# Altium PCB linkit-v4-1.1_6layers_smdonly.PcbDoc (part 4 of 5)
Units mm, origin at the board's own origin, x right, y up, seen from the top; angles counter-clockwise.
Board outline 70 x 35 mm, 6 copper layers (Top Layer, Int1 (GND), Int2 (Sign), Int3 (Sign), Int4 (PWR), Bottom Layer), stack 1.649 mm thick; 203 components, 154 nets, 694 pads, 939 vias.
Unrouted connection lines stored in the file: 1.
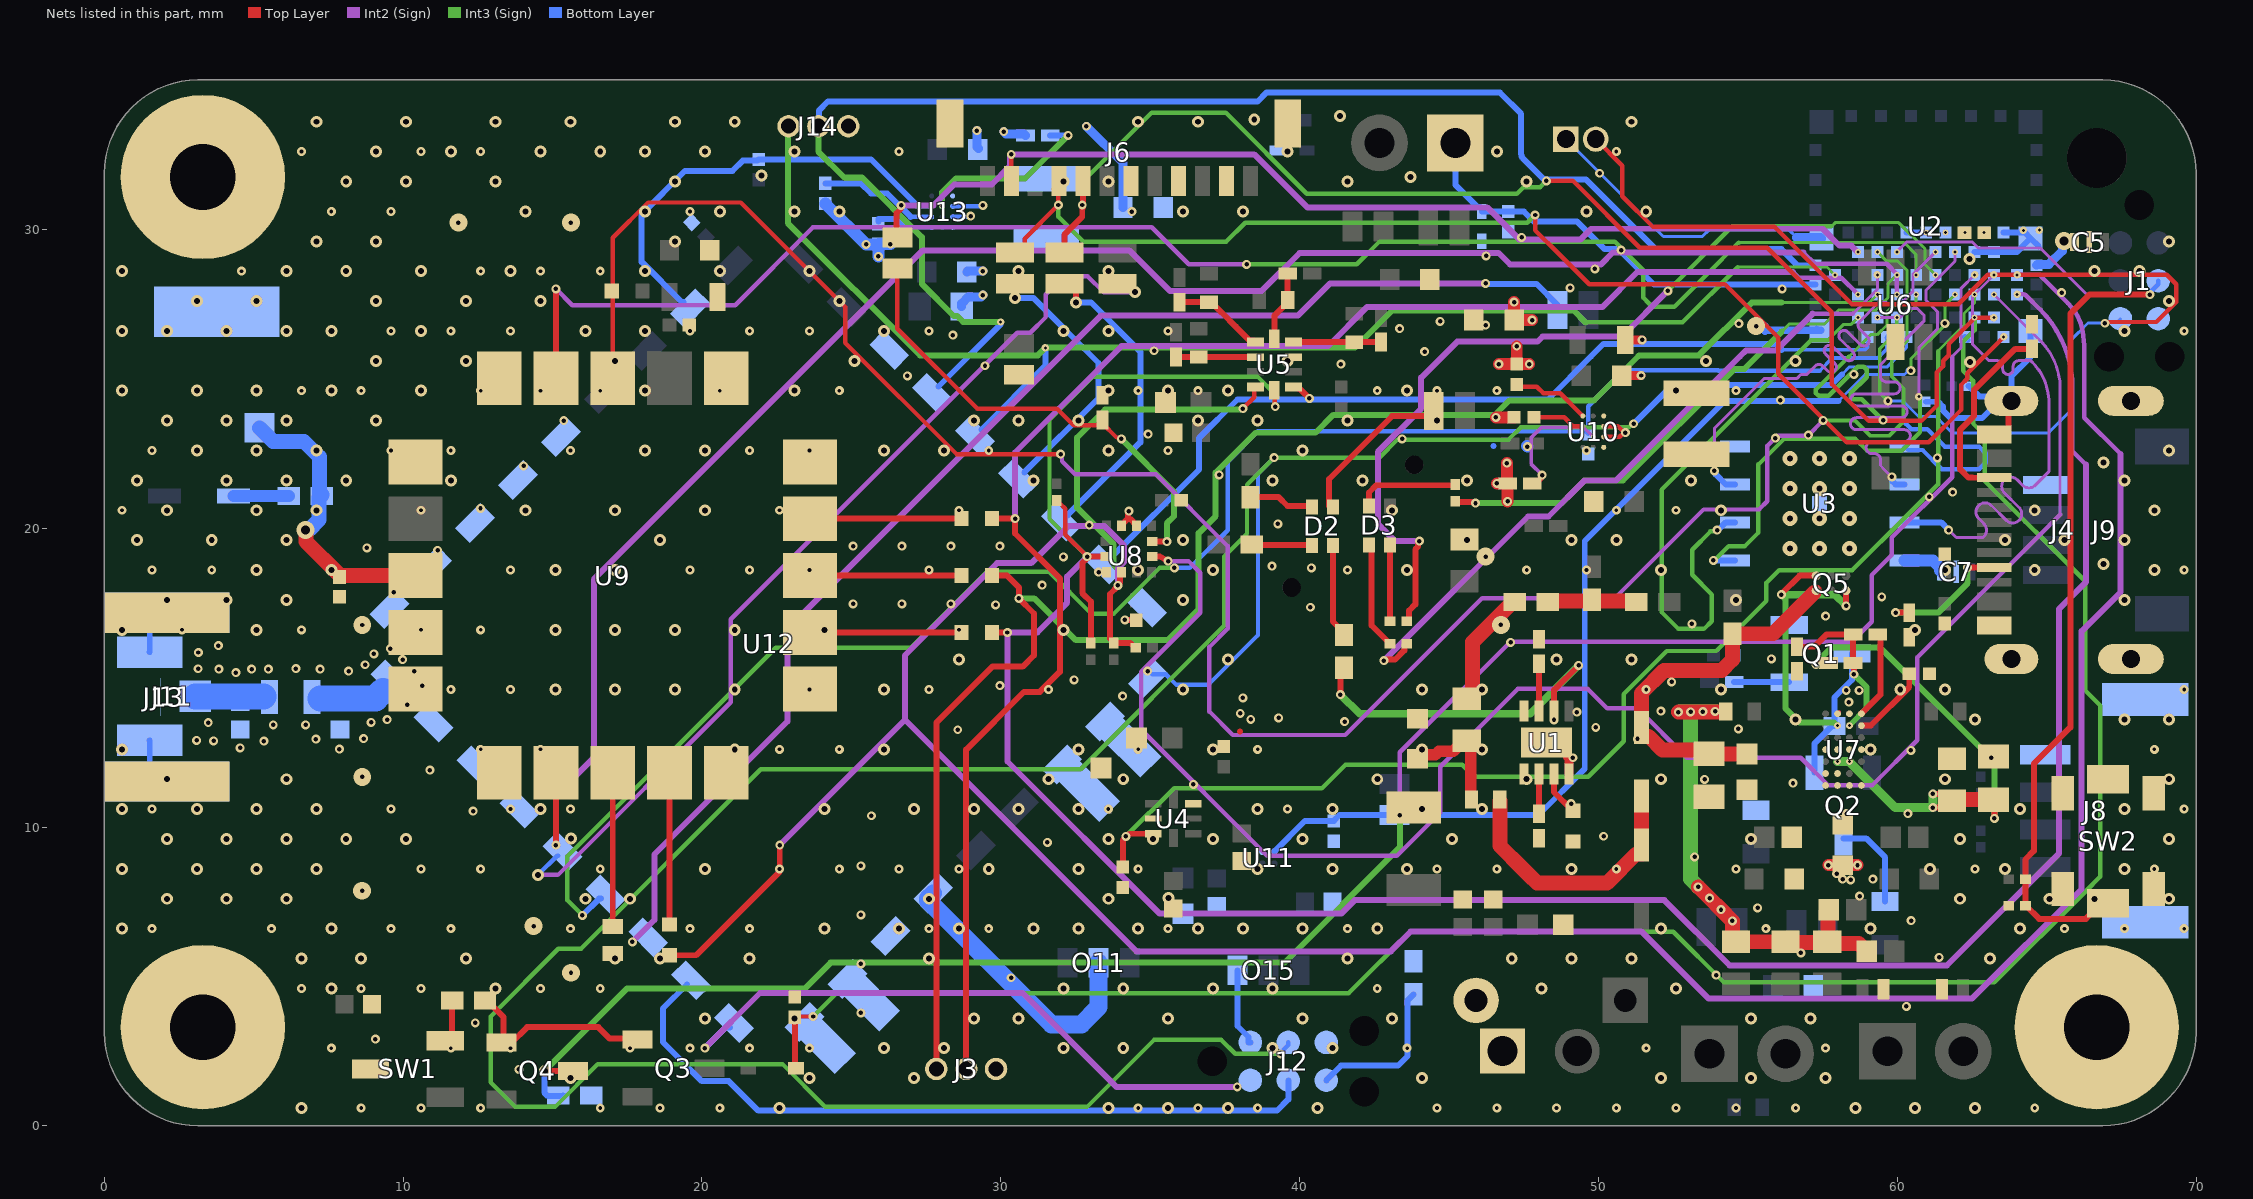
[diagram p7: the nets of this part, all layers, seen from the top]

## Via types
v1: diameter 0.3, hole 0.127, Int1 (GND) to Int3 (Sign), tented both sides, 148 vias
v2: diameter 0.4, hole 0.2, Int1 (GND) to Int2 (Sign), tented both sides, 103 vias
v3: diameter 0.3, hole 0.15, Top Layer to Int1 (GND), tented both sides, 99 vias
v4: diameter 0.4, hole 0.2, Int1 (GND) to Bottom Layer, tented both sides, 69 vias
v5: diameter 0.4, hole 0.2, Int1 (GND) to Int3 (Sign), tented both sides, 68 vias
v6: diameter 0.4, hole 0.2, Top Layer to Int1 (GND), tented both sides, 64 vias
v7: diameter 0.3, hole 0.15, Top Layer to Int4 (PWR), tented both sides, 63 vias
v8: diameter 0.3, hole 0.15, Top Layer to Int3 (Sign), tented both sides, 56 vias
v9: diameter 0.3, hole 0.15, Int1 (GND) to Bottom Layer, tented both sides, 46 vias
v10: diameter 0.4, hole 0.2, Top Layer to Bottom Layer, tented both sides, 34 vias
v11: diameter 0.3, hole 0.15, Int4 (PWR) to Bottom Layer, tented both sides, 18 vias
v12: diameter 0.3, hole 0.15, Top Layer to Int2 (Sign), tented both sides, 18 vias
v13: diameter 0.3, hole 0.15, Int3 (Sign) to Bottom Layer, tented both sides, 18 vias
v14: diameter 0.3, hole 0.15, Int2 (Sign) to Bottom Layer, tented both sides, 16 vias
v15: diameter 0.3, hole 0.15, Int1 (GND) to Int2 (Sign), tented both sides, 14 vias
v16: diameter 0.2, hole 0.1, Int3 (Sign) to Bottom Layer, tented both sides, 14 vias
v17: diameter 0.5, hole 0.2, Top Layer to Bottom Layer, tented both sides, 12 vias
v18: diameter 0.2, hole 0.1, Int2 (Sign) to Bottom Layer, tented both sides, 10 vias
v19: diameter 0.3, hole 0.15, Int2 (Sign) to Int3 (Sign), tented both sides, 9 vias
v20: diameter 0.6, hole 0.15, Int1 (GND) to Bottom Layer, tented both sides, 8 vias
v21: diameter 0.3, hole 0.15, Int1 (GND) to Int3 (Sign), tented both sides, 8 vias
v22: diameter 0.226, hole 0.1, Top Layer to Int3 (Sign), tented both sides, 6 vias
v23: diameter 0.3, hole 0.15, Top Layer to Bottom Layer, tented both sides, 5 vias
v24: diameter 0.25, hole 0.1, Int3 (Sign) to Bottom Layer, tented both sides, 5 vias
v25: diameter 0.25, hole 0.1, Int2 (Sign) to Bottom Layer, tented both sides, 5 vias
v26: diameter 0.25, hole 0.1, Top Layer to Bottom Layer, tented both sides, 5 vias
v27: diameter 0.2, hole 0.1, Top Layer to Bottom Layer, tented both sides, 3 vias
v28: diameter 0.6, hole 0.3, Top Layer to Bottom Layer, tented both sides, 3 vias
v29: diameter 0.6, hole 0.15, Int3 (Sign) to Bottom Layer, tented both sides, 2 vias
v30: diameter 0.25, hole 0.1, Int1 (GND) to Bottom Layer, tented both sides, 2 vias
v31: diameter 0.2, hole 0.1, Int1 (GND) to Bottom Layer, tented both sides, 2 vias
v32: diameter 0.4, hole 0.2, Int2 (Sign) to Bottom Layer, tented both sides, 1 vias
v33: diameter 0.4, hole 0.2, Top Layer to Int2 (Sign), tented both sides, 1 vias
v34: diameter 0.169, hole 0.1, Int3 (Sign) to Bottom Layer, tented both sides, 1 vias
v35: diameter 0.6, hole 0.15, Int4 (PWR) to Bottom Layer, tented both sides, 1 vias
v36: diameter 0.25, hole 0.1, Int2 (Sign) to Int3 (Sign), tented both sides, 1 vias
v37: diameter 0.169, hole 0.1, Top Layer to Int2 (Sign), tented both sides, 1 vias

## Nets (pads, with @x,y where several pads share a name; then routed paths per layer and width w, separated by ;. In a path a pad name is that pad's centre, name@x,y a point inside that pad or via, vN(x,y) a via of type N, cw(c..) or ccw(c..) an arc to the next point about the centre after c; other vN are vias at no path point) (continued)
GND: BT1.- C1.2 C3.1 C4.1 C5.3 C6.1 C7.3 C8.2 C9.1 C10.2 C11.1 C12.1 C13.2 C17.1 C18.1 C19.1 C20.2 C21.2 C22.2 C26.2 C27.2 C30.2 C31.2 C37.1 C38.1 C39.2 C40.1 C44.2 C45.1 C46.2 C47.1 C49.1 C51.2 C52.1 C53.1 C59.1 D7.2 D8.2 D9.2 D10.2 FB1.2 FB2.2 FB3.2 FB4.2 FB5.2 FB6.2 J1.5 J2.1 J3.1 J4.A1_B12 J4.B1_A12 J4.SHIELD J5.1 J6.2 J6.4 J6.6 J6.13 J6.14 J8.1 J8.MP1 J8.MP2 J9.1 J11.1 J11.2 J12.5 J13.2 J14.1 MH2.1 MH3.1 MH4.1 O13.1 Q1.2 R6.1 R7.1 R10.1 R11.1 R12.1 R19.1 R20.1 R21.1 R22.1 R26.1 R33.1 R34.1 R37.2 R39.2 R57.1 R58.1 R59.2 R60.2 R63.2 R65.1 R67.1 SW1.3 SW2.1 SW2.G1 SW2.G2 SW2.G3 SW2.G4 U2.1 U2.7 U2.14 U2.16 U2.18 U2.21 U2.23 U2.24 U2.25 U2.31 U3.4 U3.9 U4.3 U4.6 U5.1 U5.3 U6.2 U7.G2 U7.G3 U8.1 U8.8 U8.9 U9.1 U9.4 U9.5 U9.6 U9.10 U9.11 U9.15 U9.16 U9.20 U11.B1 U12.6 U12.13 U12.14 U12.15 U12.16 U12.17 U12.19 U12.20 U12.21 U12.29 | length 32.6
  Top Layer w0.1: U7.G3@58.001,13.792 U7.G3@58.068,13.859
  Top Layer w0.192: U8.1@33.536,18.529 U8.1@33.54,18.529
  Top Layer w0.2: v3(33.274,18.529) U8.1@33.536,18.529 ; U8.9@34.04,20.079 34.04,20.104 34.252,20.316 34.252,20.536 v3(34.29,20.574) ; v3(34.157,16.936) C38.1@34.523,16.936 ; 34.328,20.316 34.54,20.104 U8.8@34.54,20.079 ; 38.013,13.2 38.014,13.201 ; v3@38.014,13.805 v3(38.016,13.806) ; U5.1@39.797,24.728 39.935,24.728 39.999,24.664 40.009,24.664 v3(40.327,24.345) ; J4.B1_A12@63.518,23.141 63.718,23.341 63.718,24.161 J4.SHIELD@63.818,24.261
  Top Layer w0.4: v3(57.692,8.727) FB2.2@58.175,8.727 v3(58.669,8.727) ; J4.B1_A12@63.243,23.141 J4.B1_A12@63.518,23.141
  Bottom Layer w0.1: J2.1@48.911,33.02 52.17,29.761 53.477,29.761 53.689,29.972 56.387,29.972 56.626,29.733 ; U2.1@57.297,26.762 U2.1@57.46,26.599
  Bottom Layer w0.2: J11.1@1.524,12.902 1.525,12.901 1.525,12.101 J13.2@2.1,11.526 ; J11.2@1.524,15.852 J11.2@1.524,15.852 1.525,16.601 J13.2@2.1,17.176 ; 46.484,22.744 46.495,22.754 ; U2.14@60.31,29.899 v27(60.96,29.899) ; C3.1@60.96,24.231 61.367,24.231 61.526,24.072 61.526,23.944 61.79,23.68 62.837,23.68 63.418,24.261 J4.SHIELD@63.818,24.261 ; C4.1@62.384,24.752 62.404,24.752 62.742,24.414 63.665,24.414 J4.SHIELD@63.818,24.261 ; U2.21@62.585,29.249 U2.23@63.235,29.249 64.01,29.249 U2.25@64.46,29.699 ; U2.24@63.56,29.899 64.26,29.899 U2.25@64.46,29.699 ; U2.31@64.46,26.599 64.46,25.725 63.818,25.083 J4.SHIELD@63.818,24.261 ; U2.25@64.73,29.429 U2.25@64.46,29.699
  Bottom Layer w0.254: 55.575,26.599 55.412,26.762 v20(55.276,26.762) v20@55.575,26.762 ; 55.575,26.628 U2.1@57.431,26.628
  Bottom Layer w0.3: 56.626,29.733 57.425,29.733 U2.7@57.46,29.699
  Bottom Layer w0.4: v13@47.604,22.754 v13(47.625,22.733)
  other v1: 8.6,0.6 10.6,0.6 12.6,0.6 16.6,0.6 18.6,0.6 20.6,0.6 34.6,0.6 36.6,0.6 38.6,0.6 44.6,0.6 46.6,0.6 48.6,0.6 50.6,0.6 52.6,0.6 54.6,0.6 56.6,0.6 64.6,0.6 7.6,2.6 11.6,2.6 13.6,2.6 17.6,2.6 19.6,2.6 21.6,2.6 23.6,2.6 43.6,2.6 51.6,2.6 57.6,2.6 6.6,4.6 8.6,4.6 10.6,4.6 14.6,4.6 16.6,4.6 42.6,4.6 1.6,6.6 5.6,6.6 9.6,6.6 11.6,6.6 15.6,6.6 19.6,6.6 21.6,6.6 27.6,6.6 29.6,6.6 35.6,6.6 41.6,6.6 55.6,6.6 65.6,6.6 67.6,6.6 69.6,6.6 10.6,8.6 12.6,8.6 16.6,8.6 22.6,8.6 24.6,8.6 26.6,8.6 28.6,8.6 34.6,8.6 44.6,8.6 46.6,8.6 50.6,8.6 54.6,8.6 62.6,8.6 68.6,8.6 1.6,10.6 9.6,10.6 13.6,10.6 15.6,10.6 33.6,10.6 39.6,10.6 69.6,10.6 12.6,12.6 14.6,12.6 22.6,12.6 24.6,12.6 34.6,12.6 38.6,12.6 68.6,12.6 11.6,14.6 13.6,14.6 23.6,14.6 27.6,14.6 31.6,14.6 51.6,14.6 69.6,14.6 2.6,16.6 6.6,16.6 10.6,16.6 12.6,16.6 28.6,16.6 1.6,18.6 3.6,18.6 13.6,18.6 19.6,18.6 21.6,18.6 23.6,18.6 27.6,18.6 41.6,18.6 47.6,18.6 49.6,18.6 69.6,18.6 0.6,20.6 10.6,20.6 22.6,20.6 28.6,20.6 50.6,20.6 52.6,20.6 1.6,22.6 9.6,22.6 11.6,22.6 15.6,22.6 21.6,22.6 23.6,22.6 29.6,22.6 35.6,22.6 49.6,22.6 6.6,24.6 8.6,24.6 12.6,24.6 14.6,24.6 16.6,24.6 20.6,24.6 24.6,24.6 34.6,24.6 36.6,24.6 42.6,24.6 44.6,24.6 46.6,24.6 54.6,24.6 9.6,26.6 11.6,26.6 13.6,26.6 19.6,26.6 21.6,26.6 23.6,26.6 27.6,26.6 35.6,26.6 69.6,26.6 4.6,28.6 12.6,28.6 14.6,28.6 16.6,28.6 7.6,30.6 9.6,30.6 19.6,30.6 6.6,32.6 10.6,32.6 12.6,32.6 26.6,32.6 50.6,32.6
  other v2: 15.6,1.6 23.6,1.6 57.6,1.6 28.1,2.6 41.1,2.6 13.1,4.6 48.1,4.6 6.6,5.6 8.6,5.6 18.6,5.6 21.6,5.6 27.6,5.6 24.1,6.6 52.1,6.6 59.1,6.6 64.1,6.6 17.6,7.6 27.6,7.6 33.6,7.6 66.6,7.6 35.607,7.627 20.1,8.6 49.1,8.6 61.1,8.6 33.6,9.6 15.628,9.624 3.1,10.6 5.1,10.6 27.1,10.6 29.1,10.6 41.1,10.6 44.1,10.6 46.1,10.6 64.1,10.6 31.6,11.6 42.6,11.6 47.6,11.6 61.6,11.6 21.1,12.6 37.1,12.6 44.1,12.6 46.1,12.6 59.1,12.6 56.6,13.6 62.6,13.6 36.1,14.6 44.1,14.6 46.1,14.6 54.1,14.6 60.1,14.6 28.6,15.6 37.6,15.6 48.6,15.6 5.1,16.6 24.1,16.6 32.1,16.6 54.6,17.6 5.1,18.6 37.1,18.6 52.1,18.6 66.9,18.8 45.6,19.6 50.6,19.6 63.6,19.6 65.6,19.6 7.1,20.6 43.1,20.6 11.6,21.6 45.6,21.6 66.9,22.2 28.1,22.6 40.1,22.6 69.1,22.6 30.6,23.6 32.6,23.6 36.6,23.6 38.6,23.6 41.6,23.6 44.6,23.6 18.1,24.6 62.427,25.554 39.6,25.6 53.6,25.6 56.6,25.6 16.1,26.6 18.1,26.6 26.1,26.6 32.1,26.6 14.6,27.6 24.6,27.6 18.1,28.6 68.1,28.6 62.412,29.004 18.1,30.6 36.1,30.6 38.1,30.6 33.6,31.6 41.6,31.6 47.6,31.6 23.1,32.6 15.6,33.6 34.6,33.6 36.6,33.6
  other v3: 13.874,1.89 12.417,3.445 25.322,3.785 60.305,3.996 30.345,4.958 25.322,5.422 61.4,5.635 60.462,6.868 25.322,7.06 55.328,7.297 58.175,8.255 25.322,8.698 31.565,9.487 50.177,9.693 25.676,10.378 36.449,11.43 60.453,12.566 28.563,13.256 41.508,13.526 52.087,13.879 34.078,14.38 29.972,14.732 32.46,14.925 34.914,15.219 55.789,15.628 47.06,16.181 53.13,16.801 57.602,17.057 40.36,17.355 29.828,17.437 25.058,17.465 26.696,17.465 28.334,17.465 59.481,17.705 31.387,18.094 40.393,18.676 39.078,18.733 32.099,19.041 8.79,19.338 25.058,19.399 26.696,19.399 28.334,19.399 29.972,19.399 32.962,20.103 39.273,20.142 61.071,21.045 61.849,21.209 37.31,21.786 61.341,22.352 43.434,22.987 55.924,23.01 57.023,23.114 34.935,23.15 56.088,24.282 58.547,25.146 29.474,25.436 41.384,25.487 35.131,25.938 54.697,26.846 61.596,26.857 65.5,27.886 56.147,28.01 49.053,28.041 49.878,28.678 46.245,29.111 50.76,29.304 47.43,29.732 34.386,30.592 50.038,31.877
  other v4: 6.6,0.6 40.6,0.6 58.6,0.6 60.6,0.6 62.6,0.6 27.1,1.6 44.1,1.6 52.1,1.6 29.1,3.6 43.1,3.6 55.1,3.6 7.6,4.6 52.6,4.6 12.1,5.6 17.1,5.6 47.1,5.6 49.1,5.6 51.1,5.6 63.1,5.6 0.6,6.6 32.6,6.6 34.6,6.6 62.1,7.6 0.6,8.6 43.6,8.6 67.6,8.6 2.1,9.6 4.1,9.6 35.1,9.6 37.1,9.6 45.1,9.6 62.1,9.6 69.1,9.6 38.6,10.6 67.6,10.6 34.1,11.6 52.1,11.6 69.1,11.6 51.1,15.6 60.6,16.6 7.6,18.6 43.6,18.6 68.6,18.6 1.1,19.6 6.1,19.6 36.1,19.6 68.6,20.6 1.1,21.6 8.1,21.6 39.1,21.6 42.1,21.6 53.1,21.6 33.6,22.6 9.1,23.6 0.6,24.6 35.6,24.6 12.1,25.6 17.1,25.6 30.6,28.6 33.6,28.6 49.6,30.6 51.6,30.6 46.6,32.6 7.1,33.6 10.1,33.6 13.1,33.6 19.1,33.6 21.1,33.6 51.1,33.6
  other v5: 22.6,0.6 33.6,0.6 35.6,0.6 37.6,0.6 55.1,1.6 20.1,3.6 23.1,3.6 40.1,3.6 57.1,3.6 26.6,6.6 28.6,6.6 36.6,6.6 42.6,6.6 16.1,7.6 65.1,7.6 69.1,7.6 29.6,8.6 32.6,8.6 38.6,8.6 63.6,8.6 40.1,9.6 55.1,9.6 0.6,10.6 14.6,10.6 30.6,10.6 32.6,10.6 2.1,11.6 0.6,12.6 32.6,12.6 69.1,13.6 61.6,14.6 0.6,16.6 2.1,17.6 4.1,17.6 36.1,17.6 34.6,18.6 61.6,18.6 64.6,18.6 49.1,19.6 64.6,20.6 4.1,21.6 6.1,21.6 31.1,21.6 4.1,23.6 6.1,23.6 29.1,23.6 33.6,24.6 37.6,24.6 43.6,24.6 52.6,24.6 25.1,25.6 0.6,26.6 33.6,26.6 67.6,26.6 3.1,27.6 5.1,27.6 69.1,27.6 0.6,28.6 20.6,28.6 23.6,28.6 66.6,28.6 19.1,29.6 69.1,29.6 20.6,30.6 24.6,30.6 19.1,31.6 32.1,31.6 39.6,32.6
  other v6: 26.1,2.6 32.1,2.6 34.1,2.6 39.1,2.6 30.6,3.6 35.6,3.6 32.1,4.6 34.1,4.6 37.1,4.6 39.1,4.6 41.6,5.6 31.1,6.6 38.1,6.6 40.1,6.6 3.1,8.6 5.1,8.6 7.1,8.6 41.1,8.6 7.1,10.6 24.1,10.6 26.1,12.6 67.6,13.6 15.1,14.6 17.1,14.6 19.1,14.6 21.1,14.6 26.1,14.6 15.1,16.6 17.1,16.6 19.1,16.6 21.1,16.6 67.6,17.6 15.1,18.6 17.1,18.6 3.6,19.6 18.6,19.6 67.6,19.6 2.1,20.6 5.1,20.6 14.1,20.6 17.1,20.6 20.1,20.6 54.1,20.6 67.6,21.6 3.1,22.6 5.1,22.6 7.1,22.6 18.1,22.6 20.1,22.6 26.1,22.6 3.1,24.6 5.1,24.6 23.1,24.6 2.1,26.6 4.1,26.6 6.1,26.6 6.1,28.6 8.1,28.6 14.1,30.6 23.1,30.6 22,31.8 9.1,32.6 18.1,32.6 20.1,32.6
  other v9: 7.868,12.606 4.551,12.647 3.659,12.88 5.347,12.872 3.097,12.898 7.087,12.939 8.681,12.959 5.657,13.419 6.743,13.419 3.483,13.495 8.93,13.502 9.471,13.591 10.145,14.092 10.637,14.734 4.409,15.165 8.183,15.221 10.373,15.214 3.144,15.296 3.837,15.288 4.937,15.288 5.492,15.283 6.414,15.302 7.223,15.283 8.729,15.43 9.986,15.601 9.028,15.794 3.15,15.84 9.579,15.969 3.823,16.071 9.695,17.857 11.161,19.256 12.593,20.665 14.033,22.089 15.378,23.6 26.875,25.098 28.4,26.458
  other v10: 7.6,6.6 2.1,7.6 4.1,7.6 6.1,7.6 6.1,9.6 8.1,9.6 10.1,9.6 6.1,11.6 6.1,17.6 2.1,23.6 7.6,24.6 10.6,24.6 9.1,25.6 7.6,26.6 10.6,26.6 9.1,27.6 12.1,27.6 10.6,28.6 13.6,28.6 7.1,29.6 9.1,29.6 8.1,31.6 10.1,31.6 13.1,31.6 43.708,31.747 11.6,32.6 14.6,32.6 16.6,32.6 38.484,33.675 41.348,33.797
  other v12: 58.382,14.18 58.293,14.571 58.723,14.571
  other v13: 56.775,5.791 58.743,7.689 58.436,8.232 57.972,8.437
  other v14: 46.228,26.797
  other v15: 53.941,5.043 59.182,8.255 53.22,9.001 58.305,10.45 60.356,10.45 49.086,10.785 56.511,11.473 53.552,11.599 63.152,12.316 51.308,12.954 52.451,14.859 44.184,25.906 43.35,26.68 44.704,26.924
  other v17: 56.404,19.328 57.404,19.328 58.404,19.328 56.404,20.328 57.404,20.328 58.404,20.328 56.404,21.328 57.404,21.328 58.404,21.328 56.404,22.328 57.404,22.328 58.404,22.328
  other v20: 15.621,5.124 14.369,6.687 8.632,7.868 8.635,11.681 8.635,16.761 11.856,30.227 15.618,30.227
  other v21: 49.149,12.319 54.687,13.282 49.911,13.335 48.514,13.589 38.367,13.602 39.3,13.656 49.276,13.843 38.1,14.322
  other v23: 9.073,2.901 12.347,10.53 10.897,11.906
  other v29: 46.736,16.764 46.228,19.05
  other v30: 64.22,29.965 64.754,29.972
  other v31: 61.61,29.899
GPIO: J6.11 O10.1 U2.9 | length 36.6
  Top Layer w0.146: v12(30.353,32.512) J6.11@30.354,31.623 J6.11@30.354,31.623
  Top Layer w0.2: O10.1@26.543,29.731 26.514,29.76 26.514,30.54 26.67,30.696 v12(26.67,30.804)
  Int2 (Sign) w0.2: v12(26.67,30.804) 27.75,30.804 28.446,31.5 29.7,31.5 30.308,32.108 30.308,32.467 v12(30.353,32.512) 38.481,32.512 40.259,30.734 46.28,30.734 47.348,29.666 48.706,29.666 49.403,29.666 49.756,30.02 57.501,30.02 58.065,29.456 58.465,29.456 v18(58.681,29.24)
GPS_INT: U2.61 U9.19 | length 53.8
  Top Layer w0.2: U9.19@15.118,25.015 v12(15.118,28.01)
  Int2 (Sign) w0.15: v12(15.118,28.01) 15.666,27.462 21.112,27.462 23.716,30.066 35.05,30.066 36.287,28.829 v19(38.227,28.829)
  Int3 (Sign) w0.1: 54.691,29.558 60.231,29.558 60.635,29.154 v16(60.635,28.474)
  Int3 (Sign) w0.15: v19(38.227,28.829) 41.91,28.829 42.672,29.591 48.706,29.591 50.546,29.591 51.506,28.631 51.506,27.708 51.688,27.525 51.803,27.411 52.543,27.411 53.633,28.501 54.691,29.558
GPS_NRST: R48.2 U2.53 U9.18 | length 71.3
  Top Layer w0.146: U9.18@17.018,25.015 17.018,27.94 17.018,29.718 18.2,30.9 21.3,30.9 24.8,27.4 24.8,26.2 28.521,22.479 v12(32.004,22.479)
  Int2 (Sign) w0.146: v12(32.004,22.479) 32.053,22.43 32.053,22.24 32.49,21.802 35.198,21.802 37.592,19.408 37.592,16.637 36.984,16.029 36.984,13.862 37.767,13.079 41.527,13.079 46.11,17.662 50.555,17.662 53.521,20.628 55.376,20.628 55.648,20.899 55.648,22.755 55.988,23.095 57.009,23.095 v19(57.519,23.605)
  Int3 (Sign) w0.1: 60.332,26.269 60.332,27.167 60.635,27.47 v16(60.635,27.824)
  Int3 (Sign) w0.12: v19(57.519,23.605) 57.946,23.605 58.585,23.605 59.103,23.087 59.724,23.087 60.208,23.571 60.208,24.684 59.817,25.075 59.817,25.754 60.332,26.269
GPS_PPS: U2.54 U9.7 | length 62.4
  Top Layer w0.2: v12(15.113,9.398) 15.113,11.81 U9.7@15.118,11.815
  Int2 (Sign) w0.15: 56.858,29.228 57.24,28.846 59.645,28.846 59.985,28.507 v18(59.985,27.824)
  Int2 (Sign) w0.2: v12(15.113,9.398) 15.113,11.049 16.383,12.319 16.383,18.288 27.395,29.3 34.3,29.3 35.66,27.94 38.735,27.94 40.005,29.21 46.661,29.21 47.042,28.829 48.706,28.829 50.09,28.829 50.489,29.228 56.858,29.228
GPS_PWR_EN: R21.2 U2.50 U4.7 | length 42.5
  Top Layer w0.2: R21.2@34.079,8.662 34.085,8.668 34.085,9.557 34.189,9.661 v8(34.189,9.688) 34.216,9.688 34.304,9.776 35.096,9.776 U4.7@35.099,9.779
  Int3 (Sign) w0.1: 61.364,25.927 62.235,26.798 62.235,27.184 62.585,27.534 v16(62.585,27.824)
  Int3 (Sign) w0.15: v8(34.189,9.688) 35.804,11.303 40.75,11.303 41.537,12.09 45.441,12.09 45.847,11.684 49.657,11.684 50.846,12.873 50.846,14.45 52.287,15.891 53.942,15.891 55.624,17.573 55.624,18.173 56.05,18.599 58.494,18.599 60.346,20.451 61.364,21.47 61.364,25.745 61.364,25.927
GPS_UART_RX: J3.2 R40.2 U2.56 | length 54.6
  Top Layer w0.2: J3.2@28.845,1.905 28.845,12.589 30.779,14.523 31.309,14.523 31.978,15.191 31.978,18.323 30.48,19.821 v12(30.48,20.32) R40.2@29.713,20.32
  Int2 (Sign) w0.15: 56.515,28.575 56.708,28.382 58.127,28.382 v18(58.685,27.824)
  Int2 (Sign) w0.2: v12(30.48,20.32) 30.48,22.533 34.042,26.094 40.953,26.094 42.265,27.406 48.706,27.406 50.139,27.406 51.308,28.575 56.515,28.575
GPS_UART_TX: J3.3 R42.2 U2.55 | length 55.8
  Top Layer w0.2: J3.3@27.845,1.905 27.845,13.494 29.718,15.367 30.734,15.367 31.115,15.748 31.115,17.145 v8(30.607,17.653) 30.607,18.022 30.214,18.415 R42.2@29.713,18.415
  Int3 (Sign) w0.1: 56.134,27.549 59.06,27.549 v16(59.335,27.824)
  Int3 (Sign) w0.2: v8(30.607,17.653) 31.117,17.653 32.516,16.254 35.591,16.254 36.621,17.284 36.621,19.834 37.193,20.405 37.193,21.863 38.524,23.194 40.535,23.194 41.133,23.792 46.54,23.792 47.021,24.273 49.852,24.273 51.323,25.745 51.36,25.781 53.363,25.781 55.131,27.549 56.134,27.549
I2C_SCL: R1.1 R43.2 R54.1 U2.29 U5.10 U8.12 | length 89.5
  Top Layer w0.15: R54.1@31.877,20.929 31.877,20.909 31.962,20.824 31.982,20.824 32.157,20.649 32.157,19.786 v8(32.893,19.05) ; U8.12@33.513,19.052 U8.12@33.515,19.054 ; U5.10@39.159,24.618 39.173,24.604 39.173,24.083 v8(39.187,24.069)
  Top Layer w0.2: R43.2@29.713,16.515 29.716,16.512 30.224,16.512 v12(30.226,16.51) ; v8(32.893,19.05) 32.893,18.996 32.734,18.836 32.734,17.828 33.02,17.542 R1.1@33.02,16.155 ; v8@32.895,19.052 U8.12@33.513,19.052
  Int2 (Sign) w0.15: v25(64.01,27.824) 64.21,27.824 cw(c64.21,27.674) 64.316,27.78 64.793,27.302 ; 64.794,27.302 cw(c62.201,24.727) 65.831,25.146 cw(c62.201,24.727) 65.855,24.728 65.855,24.727 65.855,22.583 66.313,22.125
  Int2 (Sign) w0.2: v8(32.893,19.05) 32.223,18.38 32.223,17.509 31.224,16.51 v12(30.226,16.51) 30.226,12.192 35.306,7.112 41.406,7.112 41.847,7.552 52.208,7.552 54.393,5.367 61.661,5.367 65.416,9.122 65.416,17.298 66.313,18.196 66.313,22.125
  Int3 (Sign) w0.15: v8(32.893,19.05) 31.633,20.31 31.633,23.632 33.075,25.074 38.592,25.074 39.172,24.494 39.172,24.085 v8(39.187,24.069)
I2C_SDA: R2.1 R44.1 R56.1 U2.27 U5.9 U8.2 | length 108.5
  Top Layer w0.15: v8(38.1,24.003) 38.481,24.384 38.481,24.653 38.521,24.693 U5.9@38.521,24.728
  Top Layer w0.2: R44.1@18.918,5.71 19.807,5.71 22.606,8.509 v12(22.606,9.398) ; R2.1@33.782,16.155 33.782,16.175 33.656,16.301 33.656,16.735 33.656,17.799 33.917,18.061 33.917,18.115 33.99,18.188 33.99,18.479 U8.2@34.04,18.529 ; R2.1@33.788,16.161 34.339,16.161 34.498,16.002 R56.1@34.518,16.002
  Int2 (Sign) w0.15: v25(64.01,28.474) 64.77,28.474 65.709,27.535 cw(c64.43,26.257) 66.238,26.257 cw(c63.719,25.933) 66.258,25.992 cw(c66.108,25.989) 66.258,25.989 66.259,25.78 66.259,25.146 66.259,23.7 67.474,22.486
  Int2 (Sign) w0.2: v12(22.606,9.398) 26.797,13.589 ; v8(33.917,18.088) 33.917,18.653 34.134,18.87 34.134,19.408 33.475,20.066 32.258,20.066 31.02,18.828 29.877,18.828 26.797,15.748 26.797,13.589 ; 67.474,22.486 67.474,17.859 66.167,16.553 66.167,12.625 66.167,7.926 62.497,4.256 53.69,4.256 51.446,6.5 43.711,6.5 43.053,5.842 34.544,5.842 26.797,13.589
  Int3 (Sign) w0.2: v8(33.917,18.088) 33.917,18.643 33.782,18.778 33.782,19.461 32.56,20.683 32.56,23.035 33.496,23.971 38.068,23.971 v8(38.1,24.003)
INT1_IMU: U2.49 U8.5 | length 58.5
  Top Layer w0.2: U8.5@35.065,19.054 35.321,19.054 v12(35.599,18.901)
  Int2 (Sign) w0.1: v18(63.235,27.824) 64.797,26.262 cw(c63.22,24.684) 65.403,25.146 cw(c63.22,24.684) 65.451,24.684 65.451,24.682 65.451,20.458
  Int2 (Sign) w0.15: v12(35.599,18.901) 36.284,18.901 36.678,18.507 36.678,17.174 34.7,15.196 34.7,13.255 38.923,9.032 43.251,9.032 44.704,10.484 44.704,12.023 47.301,14.62 49.639,14.62 50.289,13.97 51.308,13.97 52.959,12.319 56.768,12.319 57.683,11.404 59.17,11.404 60.668,12.902 60.668,15.676 65.451,20.458
INT2_IMU: O10.2 R63.1 U8.6 | length 16.1
  Top Layer w0.15: O10.2@26.543,28.689 26.543,26.67 29.21,24.003 31.877,24.003 32.443,23.437 33.276,23.437 33.401,23.562 R63.1@33.401,23.622 33.401,23.509 33.876,23.035 33.988,23.035 v8(34.036,22.987)
  Top Layer w0.2: U8.6@35.065,19.554 v8(35.56,19.554)
  Int3 (Sign) w0.2: v8(34.036,22.987) 35.8,21.223 35.8,20.4 35.56,20.16 v8(35.56,19.554)
KIM_PWR_ON: U2.36 | length 0.1
  Bottom Layer w0.2: U2.36@62.26,26.399 U2.36@62.357,26.302
LED_B: R24.1 U2.63 | length 23.2
  Top Layer w0.2: v12(42.82,15.569) 42.858,15.607 43.199,15.607 43.507,15.915 43.507,16.069 43.567,16.129 R24.1@43.587,16.129
  Int2 (Sign) w0.1: 58.516,27.178 59.335,27.997 v25(59.335,28.474)
  Int2 (Sign) w0.15: 57.17,27.178 58.516,27.178
  Int2 (Sign) w0.2: v12(42.82,15.569) 47.642,20.391 48.331,20.391 49.53,21.59 50.58,21.59 54.735,25.745 54.943,25.953 55.945,25.953 57.17,27.178
LED_G: R25.1 U2.60 | length 30.4
  Top Layer w0.2: R25.1@43.587,16.891 43.607,16.891 43.667,16.951 43.667,17.244 43.874,17.451 43.874,19.293 43.969,19.389 43.969,19.527 v12(44.008,19.565)
  Int2 (Sign) w0.2: v12(44.008,19.565) 43.203,19.565 42.622,20.146 42.622,22.556 44.069,24.003 44.069,25.036 45.276,26.243 47.96,26.243 48.133,26.416 48.706,26.416 50.8,26.416 v19(52.324,27.94)
  Int3 (Sign) w0.1: 57.799,30.099 57.925,30.225 60.049,30.225 60.926,29.348 60.926,28.833 v16(61.285,28.474)
  Int3 (Sign) w0.15: v19(52.324,27.94) 54.483,30.099 57.799,30.099
LED_R: R23.1 U2.62 | length 18.2
  Top Layer w0.2: R23.1@45.212,20.903 45.242,20.873 45.857,20.873 v8(45.887,20.842)
  Int3 (Sign) w0.1: 56.134,26.579 56.384,26.829 57.563,26.829 58.039,27.305 59.283,27.305 59.692,27.713 59.692,28.181 v16(59.985,28.474)
  Int3 (Sign) w0.2: v8(45.887,20.842) 48.782,20.842 49.539,21.599 50.822,21.599 54.557,25.334 54.889,25.334 56.134,26.579
"LX1_TPS63901 3V3&2V31": L2.1 U10.A1
"LX1_TPS63901 3V3&2V32": L4.1 U13.A1
"LX2_TPS63901 3V3&2V31": L2.2 U10.D1
"LX2_TPS63901 3V3&2V32": L4.2 U13.D1
NetBT1_+: BT1.+ C40.2 R41.1 U9.3 | length 9.7
  Top Layer w0.5: v28(6.731,19.939) 6.75,19.92 6.75,19.558 C40.2@7.874,18.434 ; C40.2@7.925,18.415 U9.3@10.418,18.415
  Bottom Layer w0.5: BT1.+@5.195,23.36 5.647,22.908 6.683,22.908 7.201,22.39 7.201,21.124 7.207,21.119 R41.1@7.286,21.119 ; v28(6.731,19.939) 6.75,19.958 6.867,19.958 7.191,20.282 7.191,21.024 7.241,21.074 R41.1@7.279,21.074
NetC2_2: C2.2 R53.1 U1.8 | length 4
  Top Layer w0.4: R53.1@47.127,17.526 R53.1@47.202,17.526
  Top Layer w0.5: C2.2@45.593,14.289 45.668,14.289 45.793,14.414 45.793,16.192 R53.1@47.127,17.526
NetC5_2: C5.2 U2.26 | length 1.4
  Bottom Layer w0.3: U2.26@64.66,28.799 64.685,28.824 65.071,28.824 65.529,29.282 65.529,29.546 v28(65.586,29.603)
NetC7_2: C7.2 U3.8 | length 1.4
  Bottom Layer w0.4: U3.8@60.244,18.923 61.192,18.923 61.426,18.689 61.426,18.592 C7.2@61.476,18.542
NetC14_1: C14.1 R27.2 U5.4 | length 2.9
  Top Layer w0.2: U5.4@39.797,26.228 C14.1@41.829,26.228 R27.2@42.718,26.228
NetC15_1: C15.1 R30.2 U5.5 | length 2.5
  Top Layer w0.2: U5.5@39.159,26.338 39.159,27.113 39.604,27.558 C15.1@39.604,27.633 39.604,28.422 39.539,28.422 R30.2@39.639,28.522
NetC16_1: C16.1 R32.2 U5.6 | length 3.1
  Top Layer w0.2: R32.2@35.987,27.563 C16.1@36.967,27.563 37.042,27.563 37.395,27.21 37.403,27.21 37.868,26.744 38.334,26.278 38.471,26.278 U5.6@38.521,26.228
NetC23_1: C23.1 C24.2 C25.1 C28.2 C29.1 C32.2 C33.2 C43.2 U7.B3 U7.B4 | length 16.6
  Top Layer w0.4: v8(53.905,13.872) 54.252,13.872 C25.1@54.262,13.862
  Top Layer w0.5: v8(52.676,13.845) 54.187,13.845 C25.1@54.213,13.871 ; v8(53.34,8.001) v8(53.721,7.62) v8(54.102,7.239) v8(54.483,6.858) 54.483,6.447 54.517,6.413 54.517,6.159 54.519,6.161 C43.2@54.61,6.161 C24.2@56.261,6.161 C24.2@56.356,6.161 ; C24.2@56.38,6.137 C28.2@57.301,6.137 ; C28.2@57.682,6.161 57.682,7.128 57.706,7.152 C32.2@57.706,7.239 ; C28.2@57.741,6.107 58.711,6.107 58.866,5.952 58.881,5.952 58.976,5.857 C33.2@58.976,5.842
  Int3 (Sign) w0.5: v8@52.772,13.872 v8@53.104,13.872 ; v8(53.34,8.001) 53.086,8.255 v8(53.086,13.854) v8@53.104,13.872 ; v8(53.905,13.872) v8@53.104,13.872
  other v8: 53.496,13.863
NetC30_1: C30.1 C31.1 R36.1 U7.C2 U7.C3 | length 18
  Top Layer w0.2: v8(57.276,15.431) 57.295,15.45 57.653,15.45 R36.1@57.697,15.494 ; v8(61.195,10.653) 61.597,10.653 C31.1@61.86,10.916 ; v8(61.195,11.112) 61.604,11.112 C31.1@61.83,10.886 ; v8(63.246,10.287) C30.1@63.246,10.897
  Top Layer w0.5: C31.1@61.86,10.916 C30.1@63.227,10.916 C30.1@63.246,10.897
  Int3 (Sign) w0.2: v8(57.276,15.431) 57.276,15.458 57.326,15.508 57.326,15.543 57.785,16.002 59.436,16.002 63.246,12.192 v8(63.246,10.287)
  Int3 (Sign) w0.3: v22(58.001,12.192) v22(58.401,12.192) 59.94,10.653 v8(61.195,10.653) v8(61.195,11.112)
NetC49_2: C49.2 J11.3 J13.1 L3.2 | length 2.3
  Bottom Layer w0.87: J11.3@3.062,14.364 L3.2@5.334,14.364
NetC57_1: C57.1 R51.2 U5.7 | length 2.8
  Top Layer w0.2: R51.2@35.864,25.728 C57.1@36.626,25.728 U5.7@38.521,25.728 U5.7@38.519,25.73 ; C57.1@36.626,25.827 C57.1@36.723,25.73
NetC58_1: C58.1 D5.1 D6.1 U1.1 | length 9.1
  Top Layer w0.5: C58.1@46.703,10.872 46.703,9.374 47.462,8.615 47.462,8.61 47.813,8.259 47.818,8.259 47.949,8.128 50.292,8.128 51.269,9.105 51.435,9.105 51.435,9.271 D6.1@51.435,11.035
NetD2_1: D2.1 O9.2 | length 5.5
  Top Layer w0.2: D2.1@41.117,20.716 41.094,20.739 40.99,20.739 40.99,21.647 43.092,23.749 44.32,23.749 O9.2@44.491,23.92
NetD2_2: D2.2 R13.1 | length 2.2
  Top Layer w0.2: R13.1@38.354,21.04 39.298,21.04 39.596,20.742 40.391,20.742 D2.2@40.417,20.716
NetD2_3: D2.3 R14.2 | length 2
  Top Layer w0.2: R14.2@38.396,19.457 38.411,19.442 40.391,19.442 D2.3@40.417,19.416
NetD2_4: D2.4 R15.1 | length 3.1
  Top Layer w0.2: D2.4@41.117,19.416 41.117,16.875 41.492,16.5 R15.1@41.492,16.425
NetD3_2: D3.2 R23.2 | length 3.5
  Top Layer w0.2: D3.2@42.322,20.742 42.322,21.196 42.563,21.437 45.186,21.437 R23.2@45.212,21.463
NetD3_3: D3.3 R24.2 | length 3.6
  Top Layer w0.2: D3.3@42.322,19.442 42.409,19.355 42.409,16.747 42.947,16.209 42.947,16.189 43.007,16.129 R24.2@43.027,16.129
NetD3_4: D3.4 R25.2 | length 2.5
  Top Layer w0.2: R25.2@43.027,16.891 D3.4@43.027,19.437
NetD4_1: D4.1 R41.2 | length 1.9
  Bottom Layer w0.4: D4.1@4.323,21.074 R41.2@6.179,21.074
NetJ4_A5: J4.A5 R34.2 | length 4.7
  Top Layer w0.2: v8(59.944,17.176) R34.2@60.401,17.176 ; v8(62.357,18.691) J4.A5@63.243,18.691
  Int3 (Sign) w0.2: v8(59.944,17.176) 61.372,17.176 62.357,18.161 v8(62.357,18.691)
NetJ4_B5: J4.B5 R33.2 | length 6.6
  Top Layer w0.192: 62.517,21.691 J4.B5@62.818,21.691
  Top Layer w0.2: 62.517,21.691 62.383,21.691 62.103,21.971 62.103,23.29 62.564,23.751 62.564,24.615 63.953,26.004 R33.2@64.516,26.004 ; J4.B5@62.818,21.691 J4.B5@63.243,21.691
NetJ12_1: J12.1 O15.1 | length 2.6
  Bottom Layer w0.2: O15.1@37.922,5.207 37.922,3.343 38.291,2.975 38.291,2.794 J12.1@38.354,2.794
NetJ12_6: J12.6 R65.2 | length 5.2
  Bottom Layer w0.2: J12.6@40.894,1.524 41.388,2.018 43.293,2.018 43.615,2.34 43.615,4.203 R65.2@43.815,4.403
NetO11_2: O11.2 U12.30 | length 9.5
  Bottom Layer w0.6: U12.30@27.742,7.784 27.566,7.607 27.566,7.536 27.813,7.289 27.813,7.287 31.7,3.4 32.7,3.4 33.274,3.974 O11.2@33.274,5.461
NetQ1_1: Q1.1 R3.1 | length 1.8
  Bottom Layer w0.2: R3.1@54.544,14.846 Q1.1@56.384,14.846
NetQ1_3: Q1.3 Q2.1 R4.2 | length 4.5
  Bottom Layer w0.2: Q2.1@57.236,11.821 57.236,12.799 57.825,13.388 R4.2@57.9,13.388 57.9,14.339 58.484,14.923 Q1.3@58.484,15.801
NetQ2_3: Q2.3 R5.1 | length 3.1
  Bottom Layer w0.2: Q2.3@58.196,9.621 58.959,9.621 59.593,8.987 R5.1@59.593,7.509
NetQ3_1: Q3.1 Q4.1 R49.1 | length 6.8
  Top Layer w0.2: R49.1@12.742,4.191 12.817,4.191 13.37,3.638 13.37,2.86 13.441,2.79 13.648,2.79 14.142,3.284 14.142,3.302 16.537,3.302 16.918,2.921 17.807,2.921 Q3.1@18,2.728
NetQ5_A2: Q5.A2 Q5.C1 U7.F3 | length 10.1
  Top Layer w0.2: v8(56.126,17.777) 56.126,17.804 56.733,18.411 Q5.C1@57.285,18.411 ; v8(58.285,17.399) Q5.A2@58.285,17.911
  Int3 (Sign) w0.2: v8(56.126,17.777) 56.126,17.75 56.256,17.619 56.256,13.975 56.733,13.498 57.888,13.498 57.994,13.392 v22(58.001,13.392)
  Int3 (Sign) w0.254: v8(56.126,17.777) 57.907,17.777 v8(58.285,17.399)
NetR10_2: R10.2 U1.3 | length 1.5
  Top Layer w0.2: U1.3@48.51,11.777 48.51,11.172 49.137,10.546 R10.2@49.149,10.546
NetR11_2: R11.2 U1.2 | length 1.3
  Top Layer w0.2: R11.2@48.01,10.445 U1.2@48.01,11.777
NetR12_2: R12.2 U1.7 | length 1.6
  Top Layer w0.2: R12.2@48.006,15.463 48.008,15.461 48.008,13.879 U1.7@48.01,13.877
NetR17_1: R17.1 U2.20
  other v26: 62.26,29.899
NetR17_2: R17.2 U2.22
  other v26: 62.91,29.899
NetR36_2: R36.2 R38.1 R39.1 U7.F2 | length 5.5
  Top Layer w0.2: R39.1@56.642,16.033 57.223,16.033 57.63,16.44 R38.1@58.525,16.44 R36.2@58.525,15.498 ; R36.2@58.521,15.494 58.547,15.468 v8(58.547,15.113)
  Int3 (Sign) w0.2: v22(58.401,13.392) 58.401,13.399 58.971,13.969 58.971,14.689 v8(58.547,15.113)
NetR37_1: R37.1 U7.F1 | length 2.6
  Top Layer w0.2: U7.F1@58.801,13.392 58.806,13.397 59.117,13.397 60.401,14.681 R37.1@60.401,15.132
NetR38_2: R38.2 U7.G1 | length 2.9
  Top Layer w0.2: U7.G1@58.801,13.792 59.436,14.427 59.436,16.353 R38.2@59.349,16.44
NetR40_1: R40.1 U9.14 | length 5.1
  Top Layer w0.2: U9.14@23.618,20.315 23.623,20.32 R40.1@28.688,20.32
NetR42_1: R42.1 U9.13 | length 5.1
  Top Layer w0.2: U9.13@23.618,18.415 R42.1@28.688,18.415
NetR43_1: R43.1 U9.12 | length 5.1
  Top Layer w0.2: U9.12@23.618,16.515 R43.1@28.688,16.515
NetR44_2: R44.2 U9.9 | length 5.1
  Top Layer w0.2: R44.2@18.918,6.736 U9.9@18.918,11.815
NetR45_1: R45.1 U10.B2 | length 4.2
  Top Layer w0.2: R45.1@47.787,21.498 47.899,21.498 48.099,21.697 48.099,21.76 v12(48.118,21.78)
  Int2 (Sign) w0.1: 49.512,23.373 v37(49.828,23.057)
  Int2 (Sign) w0.12: v12(48.118,21.78) 47.747,22.15 47.747,23.021 48.098,23.373 49.512,23.373
NetR46_1: R46.1 U10.C3 | length 1.7
  Top Layer w0.15: R46.1@47.85,23.709 48.857,23.709 49.162,23.404 U10.C3@49.471,23.404
NetR47_2: R47.2 U10.D3 | length 2.6
  Top Layer w0.15: R47.2@47.266,24.737 47.938,24.737 48.162,24.513 48.36,24.513 48.362,24.511 48.724,24.511 U10.D3@49.478,23.757
NetR49_2: R49.2 SW1.2 | length 1.4
  Top Layer w0.2: SW1.2@11.41,2.855 11.417,2.855 11.642,3.08 R49.2@11.642,4.191
NetR52_1: R52.1 R53.2 R55.1 | length 3
  Top Layer w0.4: R53.2@48.302,17.526 R53.2@48.344,17.569 ; R55.1@49.741,17.569 R55.1@49.784,17.611 R55.1@49.827,17.569 ; R52.1@51.224,17.569 R52.1@51.266,17.526
  Top Layer w0.5: R53.2@48.344,17.569 R55.1@49.741,17.569 ; R55.1@49.827,17.569 R52.1@51.224,17.569
NetR68_1: R68.1 U13.B2 | length 6.1
  Int3 (Sign) w0.2: v34(28.041,30.769) 28.041,31.241 28.5,31.7 30.811,31.7 v13(32.258,33.147)
  Bottom Layer w0.2: R68.1@31.654,33.147 v13(32.258,33.147)
NetR69_1: R69.1 U13.C3 | length 4
  Bottom Layer w0.15: 26.985,30.419 U13.C3@27.691,30.419
  Bottom Layer w0.2: R69.1@24.13,31.541 25.32,31.541 25.66,31.201 26.203,31.201 26.985,30.419
NetR70_2: R70.2 U13.D3 | length 2
  Bottom Layer w0.15: 26.828,30.069 U13.D3@27.691,30.069
  Bottom Layer w0.2: R70.2@25.908,30.257 25.908,30.353 26.543,30.353 26.828,30.069
NPG_LED: R15.2 U1.6 | length 11.7
  Top Layer w0.2: v8(41.365,14.434) 41.365,15.198 R15.2@41.492,15.325 ; U1.6@48.51,13.877 48.51,14.581 v8(49.336,15.407)
  Int3 (Sign) w0.254: v8(41.365,14.434) 42.013,13.785 47.715,13.785 v8(49.336,15.407)
nRESET: C6.2 J1.3 R16.1 SW2.2 U2.13 | length 36.4
  Top Layer w0.2: C6.2@64.288,7.366 R16.1@64.288,8.255 64.288,8.916 64.573,9.201 64.573,12.122 65.789,13.338 65.789,27.177 66.425,27.813 v23(68.453,27.813) ; C6.2@64.308,7.366 64.746,6.928 66.309,6.928 66.831,7.45 SW2.2@67.056,7.45
  Int2 (Sign) w0.1: v18(59.985,29.249) 60.309,29.573 62.518,29.573 62.713,29.378 64.786,29.378 66.351,27.813 v23(68.453,27.813)
  Bottom Layer w0.15: v23(68.453,27.813) 68.453,27.881 68.736,28.164 J1.3@68.736,28.276
nRESET-SAT: J12.3 U2.42 U12.35 | length 101.6
  Int3 (Sign) w0.146: v13(39.37,2.413) 37.846,2.413 37.382,2.878 35.131,2.878 32.888,0.635 24.13,0.635 22.697,2.068 16.52,2.068 15.086,0.635 13.753,0.635 12.933,1.455 12.933,3.662 15.197,5.926 15.959,5.926 21.971,11.938 32.675,11.938 37.483,16.745 37.483,19.054 38.242,19.813 38.242,21.455 v13(39.146,22.36) 42.675,22.36 43.279,22.964 46.994,22.964 47.403,23.373 51.018,23.373 51.141,23.495 v13(51.181,23.495)
  Bottom Layer w0.1: 58.149,25.146 58.402,25.399 59.669,25.399 60.31,26.04 U2.42@60.31,26.399
  Bottom Layer w0.146: U12.35@35.073,15.114 35.525,15.114 35.884,14.756 35.895,14.767 36.952,14.767 38.608,16.424 38.608,21.822 v13(39.146,22.36) ; v13(39.37,2.413) 39.37,2.455 39.624,2.709 J12.3@39.624,2.794
  Bottom Layer w0.2: v13(51.181,23.495) 52.483,24.797 57.8,24.797 58.149,25.146
NRF_DBG: J1.6 J2.2 U2.43 | length 40.5
  Top Layer w0.146: J2.2@49.911,33.02 50.8,32.131 50.8,31.11 51.828,30.082 55.897,30.082 58.485,27.494 62.038,27.494 63.025,28.481 69.019,28.481 69.335,28.166 69.335,27.567 68.667,26.9 66.988,26.9 v23(66.947,26.858)
  Int3 (Sign) w0.12: v13(59.69,24.257) 59.412,24.535 59.412,26.002 59.985,26.575 v16(59.985,27.049)
  Bottom Layer w0.1: v13(59.69,24.257) 60.191,24.257 60.711,23.737 61.285,23.737 61.837,23.185 65.051,23.185 65.786,23.92 65.786,26.275 66.38,26.87 66.935,26.87 v23(66.947,26.858) 67.004,26.916 67.375,26.916 J1.6@67.466,27.006
PGND1: C41.1 C42.1 C48.1 C50.1 C55.2 C61.2 FB3.1 FB4.1 R45.2 R46.2 R47.1 R68.2 R69.2 R70.1 U10.B1 U10.C1 U13.B1 U13.C1 | length 18.6
  Top Layer w0.15: U10.B1@50.178,23.057 50.716,23.057 v3@50.859,23.2 ; U10.C1@50.178,23.407 50.652,23.407 v3@50.859,23.2 ; v3(50.9,23.2) v3@50.859,23.2
  Top Layer w0.3: C42.1@50.775,25.1 50.95,25.11 v3(51.426,25.11) ; C55.2@50.988,26.305 v3(51.463,26.305)
  Top Layer w0.4: v3(46.57,23.709) R46.2@47.17,23.709 ; v3(46.602,21.498) R45.2@46.963,21.498 v3(46.963,20.898) ; v3(46.666,25.489) R47.1@47.266,25.489 R47.1@47.266,25.489 ; R45.2@46.937,21.577 v3(46.937,22.177) ; v3(47.179,27.565) FB4.1@47.179,26.965 v3(47.779,26.965) ; v3(47.267,26.088) R47.1@47.266,25.489 ; v3(47.686,25.488) R47.1@47.266,25.489
  Bottom Layer w0.15: U13.C1@28.391,30.419 28.395,30.422 28.975,30.422 v9(28.994,30.441) ; U13.B1@28.391,30.769 28.395,30.765 28.95,30.765 28.956,30.771 29.371,30.771 v9(29.4,30.8) ; C41.1@29.229,32.673 C41.1@29.259,32.703 ; R68.2@30.826,33.143 R68.2@30.83,33.147
  Bottom Layer w0.3: C61.2@28.695,27.419 28.695,27.514 28.92,27.739 29.339,27.739 v9(29.4,27.8) ; C50.1@28.869,28.575 28.894,28.6 v9(29.403,28.6) ; v9(29.2,33.3) 29.2,32.762 C41.1@29.259,32.703 ; v9(30.101,33.273) 30.177,33.197 30.772,33.197 R68.2@30.826,33.143 ; v9(32.87,33.45) 34.092,32.228 FB3.1@34.092,30.734
  Bottom Layer w0.4: R69.2@24.13,30.861 24.13,30.851 24.14,30.841 24.15,30.841 v9@25.491,29.5 ; v9(25.5,29.5) R70.1@25.903,29.5 ; v9(25.903,29.097) R70.1@25.903,29.5 ; v9(26.311,29.505) R70.1@25.908,29.505 R70.1@25.903,29.5
PGND3: FB2.1 U7.A1 U7.A2 U7.A3 U7.A4
PGND4: C2.1 C58.2 FB6.1 U1.4 U1.9 | length 5.5
  Top Layer w0.3: U1.9@48.26,12.827 48.61,12.827 48.96,12.477 48.96,12.351 49.01,12.301 U1.4@49.01,11.777
  Top Layer w0.385: FB6.1@43.942,12.279 44.075,12.412 44.543,12.412 44.663,12.532 45.141,12.532 45.498,12.889 C2.1@45.593,12.889 45.72,12.762 45.72,10.955 C58.2@45.753,10.922
POWER_CONTROL: D1.2 R58.2 U2.35 | length 69.6
  Top Layer w0.15: R58.2@23.114,3.638 23.136,3.661 v8(23.727,3.661)
  Top Layer w0.2: R58.2@23.114,3.628 23.114,1.968 D1.2@23.152,1.93 D1.2@23.207,1.93
  Int3 (Sign) w0.15: v8(23.727,3.661) 24.511,4.445 41.645,4.445 43.7,6.5 52.5,6.5 54.2,4.8 63.25,4.8 66.288,7.838 66.793,8.342 66.793,14.064 66.288,14.569 66.288,18.221 62.921,21.588 62.921,23.119 62.536,23.504 62.536,24.933 62.2,25.269 62.2,26.244 62.585,26.629 v16(62.585,27.049)
QSPI_CLK: U2.45 U3.6 | length 17.4
  Int2 (Sign) w0.1: v18(59.335,27.049) 60.098,27.049 60.394,27.344 60.674,27.344 60.887,27.131 60.887,26.921 59.71,25.745 59.436,25.471 59.436,25.146 59.436,25.096 ccw(c59.636,25.096) 59.636,24.896 59.898,24.896 cw(c59.898,24.696) 59.898,24.496 58.636,24.496 ccw(c58.636,24.296) 58.636,24.096 60.129,24.096 cw(c60.129,23.896) 60.129,23.696 58.636,23.696 ccw(c58.636,23.496) 58.636,23.296 60.236,23.296 cw(c60.236,23.096) 60.236,22.896 59.158,22.896 ccw(c59.158,22.696) 59.158,22.496 59.236,22.496 cw(c59.236,22.296) 59.436,22.296 59.436,22.098 59.568,21.966 v14(59.817,21.717)
  Bottom Layer w0.2: v14(59.817,21.717) 59.844,21.69 59.844,21.563 59.944,21.463 U3.6@60.244,21.463
QSPI_CS: U2.19 U3.1 | length 18
  Int2 (Sign) w0.1: v36(60.722,24.405) 60.722,26.046 61.346,26.67 61.346,27.247 60.954,27.639 60.954,27.953 61.935,28.933 v18(61.935,29.249)
  Int3 (Sign) w0.15: v14(53.848,18.923) 53.882,18.923 54.36,19.401 54.902,19.401 55.356,19.855 55.356,22.134 56.209,22.987 58.599,22.987 59.002,22.584 60.129,22.584 60.761,23.216 60.761,24.366 v36(60.722,24.405)
  Bottom Layer w0.2: v14(53.848,18.923) U3.1@54.564,18.923
QSPI_IO0: U2.11 U3.5 | length 18.9
  Int3 (Sign) w0.1: 58.384,25.745 59.115,26.476 59.327,26.476 59.653,26.802 59.653,27.239 59.879,27.465 60.101,27.465 60.32,27.684 60.32,28.638 60.021,28.937 59.647,28.937 v16(59.335,29.249)
  Int3 (Sign) w0.15: 58.384,25.745 57.28,24.641 57.28,24.517 57.368,24.429 57.703,24.429 58.674,25.4 58.875,25.4 58.976,25.299 58.976,25.054 58.449,24.527 58.449,24.403 58.537,24.315 58.812,24.315 v13@59.513,23.614
  Bottom Layer w0.15: v13(59.524,23.614) 60.171,23.614 60.467,23.317 61.007,23.317 61.591,22.733 62.738,22.733 62.963,22.508 62.963,22.196 62.738,21.971 61.491,21.971 60.846,22.616 60.361,22.616 U3.5@60.244,22.733
QSPI_IO1: U2.47 U3.2 | length 19.5
  Int3 (Sign) w0.1: 57.673,26.289 58.206,26.822 58.458,26.822 v16(58.685,27.049)
  Int3 (Sign) w0.15: v14(53.975,19.939) 53.927,19.891 53.749,19.891 53.137,19.279 53.137,18.438 53.794,17.781 53.794,16.89 53.531,16.627 52.679,16.627 52.113,17.194 52.113,21.287 56.57,25.745 57.114,26.289 57.673,26.289
  Bottom Layer w0.2: v14(53.975,19.939) 54.01,19.939 54.264,20.193 U3.2@54.564,20.193
QSPI_IO2: U2.17 U3.3 | length 16.7
  Int2 (Sign) w0.1: v14(53.884,21.917) 53.884,23.346 55.543,25.005 56.633,25.005 56.774,25.146 56.973,25.146 57.255,25.429 cw(c57.379,25.305) 57.503,25.429 57.662,25.27 ccw(c57.786,25.393) 57.91,25.27 ccw(c57.786,25.393) 57.91,25.517 57.604,25.823 cw(c57.727,25.947) 57.604,26.071 cw(c57.727,25.947) 57.851,26.071 58.269,25.653 ccw(c58.393,25.776) 58.517,25.653 ccw(c58.393,25.776) 58.517,25.9 58.099,26.318 cw(c58.222,26.442) 58.099,26.566 cw(c58.222,26.442) 58.346,26.566 58.764,26.148 ccw(c58.888,26.271) 59.012,26.148 ccw(c58.888,26.271) 59.012,26.395 58.74,26.666 cw(c58.864,26.79) 58.74,26.914 59.375,27.549 ; 59.306,27.48 59.306,27.49 59.365,27.549 59.375,27.549 ; v18(61.285,29.249) 60.521,28.485 60.521,27.923 60.09,27.492 59.701,27.492 59.644,27.549 59.375,27.549
  Bottom Layer w0.2: v14(53.884,21.917) 53.922,21.879 53.922,21.805 54.264,21.463 U3.3@54.564,21.463
QSPI_IO3: U2.57 U3.7 | length 18.5
  Int2 (Sign) w0.1: v14(61.722,19.939) 61.976,19.685 62.865,19.685 62.9,19.72 ccw(c62.685,19.935) 62.9,20.15 62.723,20.327 cw(c62.938,20.542) 62.723,20.757 cw(c62.938,20.542) 63.153,20.757 63.647,20.263 ccw(c63.862,20.478) 64.077,20.263 ccw(c63.862,20.478) 64.077,20.693 63.583,21.187 cw(c63.798,21.402) 63.583,21.617 cw(c63.798,21.402) 64.013,21.617 64.19,21.44 ccw(c64.405,21.655) 64.62,21.44 65.072,21.892 65.072,24.302 ccw(c63.173,24.211) 64.829,25.146 ccw(c63.173,24.211) 64.605,25.461 64.463,25.604 64.104,25.604 64.054,25.604 ccw(c64.054,25.429) 63.879,25.429 63.879,25.321 cw(c63.704,25.321) 63.704,25.146 cw(c63.704,25.321) 63.529,25.321 63.529,25.429 ccw(c63.354,25.429) 63.354,25.604 63.066,25.604 62.891,25.779 62.515,26.155 62.515,27.754 v25(63.235,28.474)
  Bottom Layer w0.2: U3.7@60.244,20.193 61.468,20.193 v14(61.722,19.939)
REED_MCU: Q4.3 R7.2 U2.58 | length 67.7
  Top Layer w0.2: v10(14.744,1.845) 15.536,1.845 Q4.3@15.541,1.84
  Int2 (Sign) w0.1: 61.841,25.745 62.141,26.044 62.141,28.029 v25(62.585,28.474)
  Int2 (Sign) w0.15: v19(43.355,10.394) 43.354,10.395 43.354,12.499 47.06,16.205 58.485,16.205 59.146,16.866 59.146,18.432 59.819,19.106 59.819,19.687 61.841,21.709 61.841,25.745
  Int3 (Sign) w0.2: v10(14.744,1.845) 17.49,4.591 23.442,4.591 24.312,5.461 39.497,5.461 43.355,9.319 v19(43.355,10.394)
  Bottom Layer w0.2: v10@14.73,1.831 14.73,1.111 14.848,0.994 15.326,0.994 R7.2@15.348,1.016
RX-OUT: C26.1 C27.1 D6.2 Q5.C2 R35.2 U7.D1 U7.D2 U7.D3 U7.D4 | length 13
  Top Layer w0.4: Q5.C2@57.222,17.848 Q5.C2@57.285,17.911
  Top Layer w0.5: C27.1@54.972,12.446 54.969,12.449 53.705,12.449 53.701,12.453 53.582,12.572 52.144,12.572 51.681,13.035 51.435,13.035 D6.2@51.435,13.335 51.435,14.478 52.197,15.24 54.126,15.24 54.483,15.597 R35.2@54.483,16.468 54.687,16.468 55.842,16.468 Q5.C2@57.222,17.848
SAFE: R26.2 U9.8 | length 5.1
  Top Layer w0.2: R26.2@17.018,6.673 U9.8@17.018,11.815
SAT_EN: O14.2 R20.2 U2.51 U11.B2 | length 35.6
  Int3 (Sign) w0.1: v13(60.452,25.273) 60.452,25.66 61.604,26.811 61.604,27.478 61.935,27.81 v16(61.935,27.824)
  Bottom Layer w0.1: 58.032,24.257 58.918,25.143 60.243,25.143 v13@60.373,25.273
  Bottom Layer w0.2: U11.B2@39.154,9.175 40.184,10.205 R20.2@41.148,10.205 ; R20.2@41.148,10.215 41.334,10.401 O14.2@43.18,10.401 47.993,10.401 49.543,11.951 49.543,19.571 54.229,24.257 58.032,24.257 ; v13@60.373,25.273 v13(60.452,25.273)
SAT_INT: U2.46 U12.1 | length 29.4
  Bottom Layer w0.12: 56.134,25.968 58.924,25.968 59.01,26.054 U2.46@59.01,26.399
  Bottom Layer w0.2: U12.1@33.667,18.993 36.638,21.964 36.638,23.022 37.924,24.309 48.312,24.309 49.748,25.745 50.165,26.162 55.94,26.162 56.134,25.968
SAT_SPI_MISO: O4.1 U12.2 | length 10.2
  Top Layer w0.2: O4.1@32.131,28.181 32.282,28.181 32.512,27.951 v10(32.512,27.559)
  Bottom Layer w0.2: U12.2@32.23,20.43 34.671,22.871 34.671,25.908 33.02,27.559 v10(32.512,27.559)
SAT_SPI_MOSI: O3.1 U12.22 | length 32.2
  Top Layer w0.15: O3.1@33.909,28.181 34.079,28.181 34.334,27.926 34.47,27.926 v33(34.495,27.901)
  Int2 (Sign) w0.15: v32(14.51,8.396) 15.185,8.396 20.965,14.177 20.965,16.425 20.965,16.954 30.554,26.543 30.988,26.543 31.513,27.068 31.513,27.83 32.107,28.424 32.917,28.424 33.44,27.901 v33(34.495,27.901)
  Bottom Layer w0.15: v32@14.51,8.396 15.157,9.044 U12.22@15.19,9.044
SAT_SPI_NSS: O1.1 U12.24 | length 43.6
  Int2 (Sign) w0.2: v14(17.674,6.154) 18.415,6.895 18.415,9.088 22.86,13.533 22.86,16.621 33.353,27.114 39.941,27.114 41.021,28.194 v14(46.228,28.194)
  Bottom Layer w0.2: v14(46.228,28.194) 46.247,28.175 47.928,28.175 48.628,27.475 O1.1@48.628,27.305
SAT_SPI_SCK: O2.1 U12.3 | length 8.9
  Top Layer w0.2: v10(30.479,27.699) O2.1@30.48,28.181 O2.1@30.48,28.181
  Bottom Layer w0.2: v10(30.479,27.699) 31.102,27.699 33.274,25.527 33.274,24.348 U12.3@30.793,21.867
SAT_SWCLK: J12.4 U12.25 | length 24.9
  Bottom Layer w0.2: U12.25@19.501,4.733 18.7,3.932 18.7,2.8 20,1.5 20.9,1.5 21.892,0.508 39.243,0.508 39.624,0.889 J12.4@39.624,1.524
SAT_SWDIO: J12.2 U12.26 | length 21
  Int2 (Sign) w0.2: v14(20.1,2.6) 21.945,4.445 30.734,4.445 33.871,1.308 v14(37.915,1.308)
  Bottom Layer w0.2: v14(20.1,2.6) 20.797,3.297 U12.26@20.937,3.297
SAT_UART_RX: J14.2 U2.6 U12.5 | length 50.6
  Int3 (Sign) w0.2: J14.2@23.901,33.451 23.901,32.599 24.766,31.734 25.366,31.734 27.361,29.739 27.361,28.173 28.434,27.1 28.542,27.1 28.742,26.9 v24(30,26.9)
  Bottom Layer w0.2: J14.2@23.922,33.473 23.922,33.984 24.215,34.277 38.595,34.277 38.889,34.571 46.709,34.571 47.416,33.864 47.416,32.516 ccw(c47.616,32.517) 47.474,32.376 48.175,31.675 49.578,31.675 51.916,29.337 56.12,29.337 56.659,28.799 U2.6@57.26,28.799 ; U12.5@27.919,24.74 29.99,26.811 29.99,26.89 v24(30,26.9)
SAT_UART_TX: J14.3 U2.5 U12.4 | length 45.4
  Int3 (Sign) w0.1: 54.661,28.736 57.648,28.736 v16(57.91,28.474)
  Int3 (Sign) w0.15: 49.565,26.889 52.814,26.889 54.661,28.736
  Int3 (Sign) w0.2: J14.3@22.901,33.451 22.876,33.427 22.876,30.21 27.305,25.781 31.242,25.781 v24(31.496,26.035) ; v24@31.496,26.042 41.855,26.042 43.098,27.285 48.706,27.285 49.169,27.285 49.565,26.889
  Bottom Layer w0.2: J14.3@22.876,33.427 J14.3@22.901,33.451 ; U12.4@29.356,23.303 31.496,25.443 v24(31.496,26.035)
SAT_WKUP: R19.2 U2.44 U12.23 | length 57.8
  Int3 (Sign) w0.15: v14(16.005,7.046) 15.494,7.556 15.494,9.017 22.477,16 27,16 29.542,18.542 31.623,18.542 33.02,17.145 33.79,17.145 35.314,18.669 v13(35.814,18.669)
  Bottom Layer w0.12: 57.404,25.273 57.826,25.695 59.346,25.695 59.642,25.99 U2.44@59.642,26.38
  Bottom Layer w0.15: v13(35.814,18.669) 36.33,18.669 37.592,19.931 37.592,22.225 38.608,23.241 49.575,23.241 R19.2@49.657,23.159 49.657,24.081 50.862,25.286 54.001,25.286 54.014,25.273 57.404,25.273 ; U2.44@59.642,26.38 U2.44@59.66,26.399
  Bottom Layer w0.2: v14(16.005,7.046) 16.566,7.607 U12.23@16.627,7.607
"SEL_TPS63901 3V3&2V32": R66.1 U12.10 U13.B3 | length 14.7
  Bottom Layer w0.15: 27.231,30.769 U13.B3@27.691,30.769
  Bottom Layer w0.2: U12.10@19.387,27.571 19.325,27.571 17.982,28.914 17.982,30.504 19.43,31.952 21.021,31.952 21.368,32.299 21.859,32.299 R66.1@21.9,32.34 25.66,32.34 27.231,30.769
SLOW_SWS_SEND: D7.1 J10.1 R59.1 U2.4 | length 14.9
  Bottom Layer w0.146: 47.836,30.269 ccw(c47.94,30.372) 47.852,30.255
  Bottom Layer w0.2: J10.1@45.212,32.893 45.212,31.488 45.946,30.754 46.041,30.754 46.101,30.694 D7.1@46.101,30.599 R59.1@46.99,30.599 47.506,30.599 47.836,30.269 ; 47.852,30.255 48.706,30.255 49.29,30.255 50.199,29.346 50.664,29.346 51.861,28.149 U2.4@57.26,28.149
SMD_ANT: C47.2 L3.1 U12.18 | length 2.2
  Bottom Layer w0.87: L3.1@7.239,14.303 7.874,14.303 7.892,14.303 9.078,14.303 9.327,14.552
SMD_PB13: U12.0
SMD_RF_BUSY: TP14.1 U12.27
SMD_RF_NRST: TP15.1 U12.28
SMD_SCL: TP17.1 U12.33
SMD_SDA: TP16.1 U12.34
SPI_CLK: J6.9 O2.2 U2.32 | length 42.3
  Top Layer w0.15: O2.2@30.48,29.223 30.548,29.223 30.803,29.478 30.803,29.69 v8(31.928,30.815) J6.9@31.928,31.493 ; J6.9@31.779,31.344 J6.9@31.928,31.493 ; v8(47.879,30.48) 47.879,29.972 48.706,29.145 49.688,28.163 54.233,28.163 56.017,26.379 56.017,25.745 56.017,25.166 58.303,22.88 61.058,22.88 62.135,23.957 62.135,24.792 62.346,25.004 62.346,25.185 v26(63.56,26.399) ; J6.9@31.928,31.493 31.954,31.519 J6.9@31.954,31.623 31.928,31.597 J6.9@31.928,31.493
  Int3 (Sign) w0.15: v8(31.928,30.815) 31.928,30.429 32.766,29.591 37.545,29.591 38.18,30.226 47.619,30.226 47.873,30.48 v8(47.879,30.48)
SPI_MISO: J6.8 O4.2 U2.33 | length 43.4
  Top Layer w0.15: v8(48.26,31.623) 49.149,31.623 51.384,29.388 55.649,29.388 57.813,27.224 57.813,24.824 59.048,23.589 60.81,23.589 61.327,24.105 61.327,25.213 61.538,25.424 61.538,25.598 61.722,25.782 61.722,26.162 62.609,27.049 v26(63.235,27.049)
  Top Layer w0.2: O4.2@32.131,29.223 32.131,29.825 32.728,30.422 v8(32.728,30.815) ; v8@32.754,30.724 J6.8@32.754,31.623
  Int3 (Sign) w0.15: v8(32.728,30.815) 32.728,31.585 35.052,33.909 37.529,33.909 40.242,31.195 47.275,31.195 47.493,31.413 48.047,31.413 48.257,31.623 v8(48.26,31.623)